# Altium PCB VolumeAttenuator.PcbDoc
Units mm, origin at the board's own origin, x right, y up, seen from the top; angles counter-clockwise.
Board outline 99.06 x 48.26 mm, 2 copper layers (Top Layer, Bottom Layer); 79 components, 75 nets, 291 pads, 27 vias.
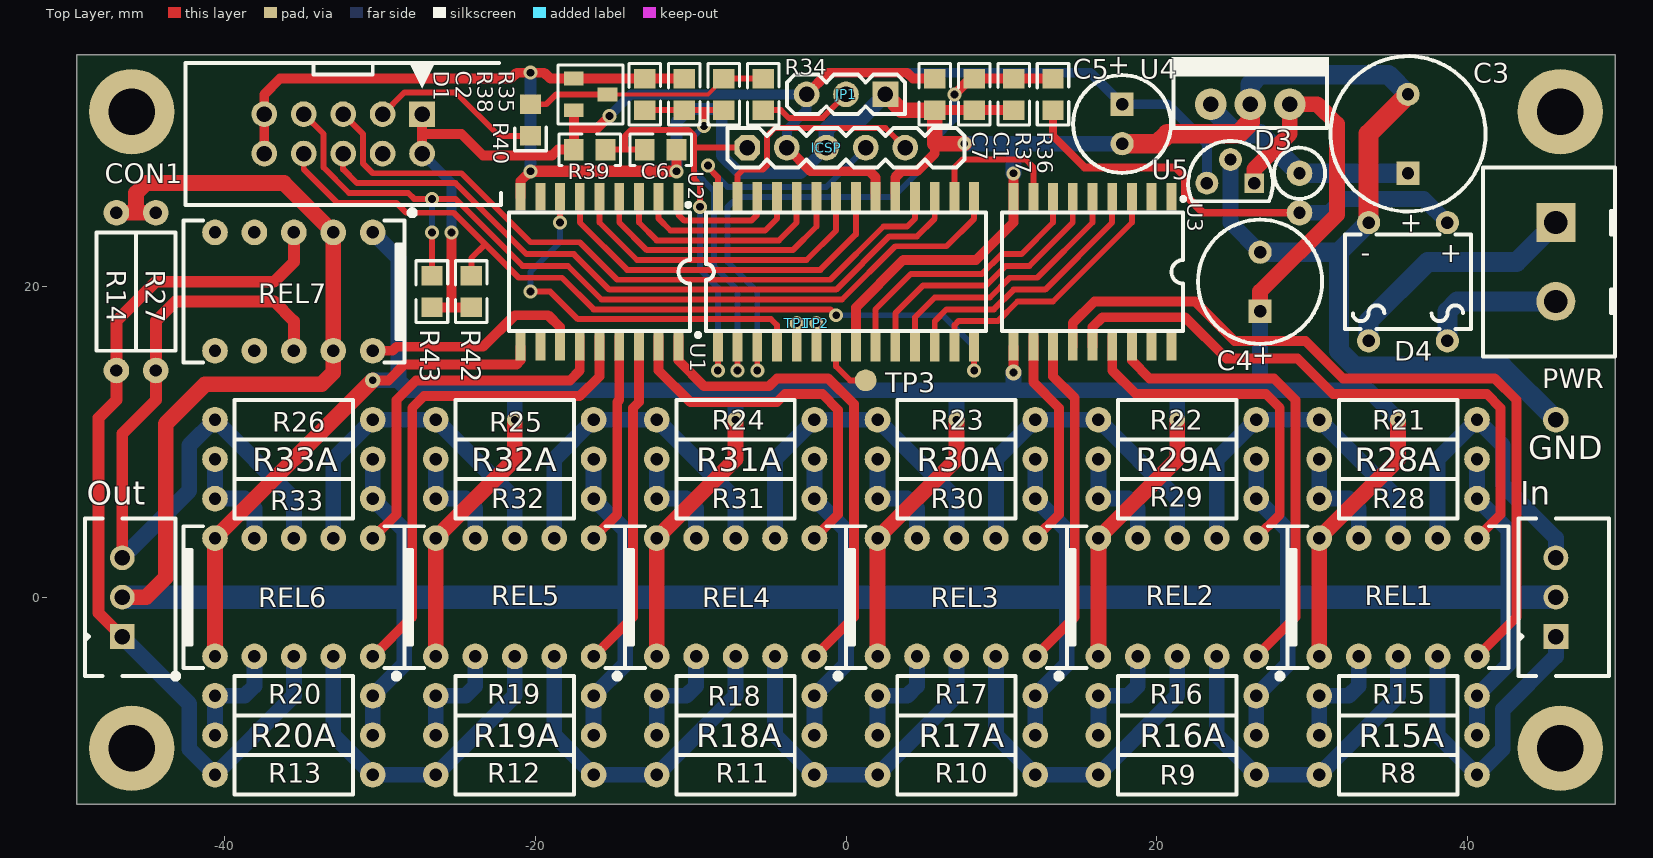
[diagram p0: Top Layer view]
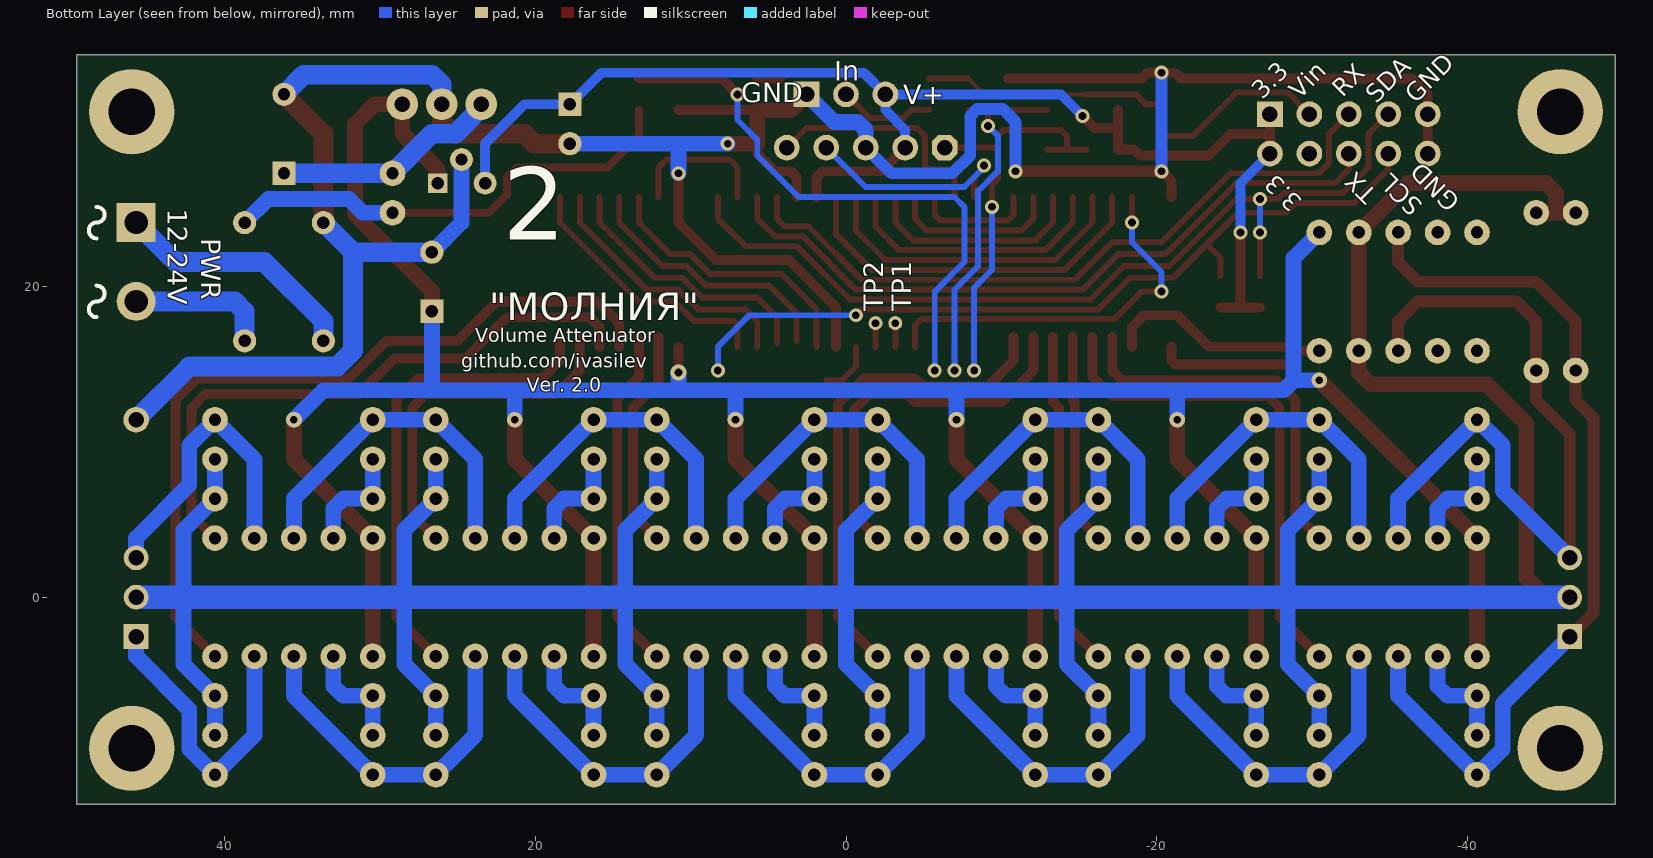
[diagram p1: Bottom Layer view, seen from below]

## Layer stack, top to bottom
Top Layer: signal copper 0.0356
Dielectric: dielectric 0.32, FR-4, Dk 4.8
Bottom Layer: signal copper 0.0356

## Board outline
-49.53,-13.335 -49.53,34.925 49.53,34.925 49.53,-13.335

## Design rules (kind name [scope] priority, off if disabled: settings)
Clearance [All] p1: gap=0.241
ComponentClearance [All] p1: gap=0.254 collisioncheckmode=3 verticalgap=0.254
HoleSize [All] p1: absolutevalues=TRUE maxlimit=5 minlimit=0.5 maxpercent=80.000 minpercent=20.000
PolygonConnect [All] p1: connectstyle=Relief reliefconductorwidth=0.254 reliefentries=4 polygonreliefangle="90 Angle"
RoomDefinition U_Power [InComponentClass('U_Power')] p1: confinementstyle=ConfineIn formatcopy=TRUE lockcomponents=FALSE outline 50.038,35.306 -24.13,35.306 -24.13,-13.335 50.038,-13.335
RoomDefinition U_Control [InComponentClass('U_Control')] p2: confinementstyle=ConfineIn formatcopy=TRUE lockcomponents=FALSE outline 49.53,35.306 -24.13,35.306 -24.13,-13.335 49.53,-13.335
RoomDefinition U_Attenuator [InComponentClass('U_Attenuator')] p3: confinementstyle=ConfineIn formatcopy=TRUE lockcomponents=FALSE outline 49.784,35.306 -24.13,35.306 -24.13,-13.335 49.784,-13.335
RoomDefinition Main [InComponentClass('Main')] p4: confinementstyle=ConfineIn formatcopy=TRUE lockcomponents=FALSE outline 50.673,-14.224 70.358,-14.224 70.358,-1.016 50.673,-1.016
RoutingVias [All] p1: holewidth=0.711 width=1.27 viastyle="Through Hole" minholewidth=0.711 minwidth=1.27 maxholewidth=0.711 maxwidth=1.27
SolderMaskExpansion [All] p1: expansion=0.102
TestPointUsage [All] p1: valid=0 allowmultiple=FALSE
Testpoint [All] p1: side=15 testpointundercomponent=TRUE minsize=1.016 maxsize=2.54 preferedsize=1.524 minholesize=0 maxholesize=1.016 preferedholesize=0.813 testpointgrid=0.025 style=1023 order=0123456789
Width [All] p1: maxlimit=2.54 minlimit=0.254 preferedwidth=0.254 toplayer_prefwidth=0.381 bottomlayer_prefwidth=0.381 minimp=50.000000 maximp=50.000000 favimp=50.000000
17 further rules are at their usual default settings.

## Classes and differential pairs
component class U_Power: C3 C4 C5 D3 D4 U4 U5
component class U_Control: C1 C2 C6 C7 D1 ICSP R34 R35 R36 R37 R38 R39 R40 R42 R43 TP1 TP2 TP3 U1
component class U_Attenuator: R8 R9 R10 R11 R12 R13 R14 R15 R15A R16 R16A R17 R17A R18 R18A R19 R19A R20 R20A R21 R22 R23 R24 R25 R26 R27 R28 R28A R29 R29A R30 R30A R31 R31A R32 R32A R33 R33A REL1 REL2 REL3 REL4 REL5 REL6 REL7 U2 U3 U?
component class Main: CON1 GND In J3 J5 JP1 Out PWR

## Components (designator, comment, footprint, x,y, rotation, side; value= is the part's Value field where it differs from the comment)
C1 "100nF" 0805_1 8.255,32.385 r270 top
C2 "100nF" 0805_1 -12.954,32.385 r90 top
C3 "470uF/35V" EC10x20 36.195,29.845 r90 top
C4 "470uF/35V" EC8x16 26.67,20.32 r90 top
C5 "1000uF/16V" EC6.3x12 17.78,30.48 r270 top
C6 "10nF" 0805_1 -11.938,28.829 r0 top
C7 "100nF" 0805_1 5.715,32.385 r270 top
CON1 "BH10S" BH10S -32.385,29.845 r0 top
D1 "BAV99" SOT-23 -16.51,32.385 r270 top
D3 "1N4007" R400_V 29.21,27.305 r270 top
D4 "DB107" BRIDGE_PTH 36.195,20.32 r0 top
GND "TESTPAD" MISC_PAD-36/65 45.72,11.43 r90 top (schematic designator TP4)
ICSP "CON6" JP6 0,28.956 r0 top
In "CON3" CON_WS03S 45.72,0 r90 top
JP1 "Jumper, 3pin" JP3 0,32.385 r180 top
Out "CON3" CON_WS03S -46.609,0 r90 top
PWR "Power" CONN_TOP_2P 45.72,21.59 r270 top
R8 "560" R400_1 35.56,-11.43 r180 top
R9 "1.1k" R400_1 21.336,-11.43 r180 top
R10 "2.05k" R400_1 7.112,-11.43 r180 top
R11 "3.6k" R400_1 -7.112,-11.43 r180 top
R12 "5.9k" R400_1 -21.336,-11.43 r180 top
R13 "8.2k" R400_1 -35.56,-11.43 r180 top
R14 "18k" R400_1 -46.99,19.685 r270 top
R15 "169k" R400_1 35.56,-6.35 r180 top
R15A "NA" R400_1 35.56,-8.89 r180 top
R16 "82k" R400_1 21.336,-6.35 r180 top
R16A "NA" R400_1 21.336,-8.89 r180 top
R17 "38k" R400_1 7.112,-6.35 r180 top
R17A "NA" R400_1 7.112,-8.89 r180 top
R18 "16.9k" R400_1 -7.112,-6.35 r180 top
R18A "NA" R400_1 -7.112,-8.89 r180 top
R19 "6.49k" R400_1 -21.336,-6.35 r180 top
R19A "NA" R400_1 -21.336,-8.89 r180 top
R20 "1.8k" R400_1 -35.56,-6.35 r180 top
R20A "NA" R400_1 -35.56,-8.89 r180 top
R21 "560" R400_1 35.56,11.43 r180 top
R22 "1.1k" R400_1 21.336,11.43 r180 top
R23 "2.05k" R400_1 7.112,11.43 r180 top
R24 "3.6k" R400_1 -7.112,11.43 r180 top
R25 "5.9k" R400_1 -21.336,11.43 r180 top
R26 "8.2k" R400_1 -35.56,11.43 r180 top
R27 "18k" R400_1 -44.45,19.685 r270 top
R28 "169k" R400_1 35.56,6.35 r180 top
R28A "NA" R400_1 35.56,8.89 r180 top
R29 "82k" R400_1 21.336,6.35 r180 top
R29A "NA" R400_1 21.336,8.89 r180 top
R30 "38k" R400_1 7.112,6.35 r180 top
R30A "NA" R400_1 7.112,8.89 r180 top
R31 "16.9k" R400_1 -7.112,6.35 r180 top
R31A "NA" R400_1 -7.112,8.89 r180 top
R32 "6.49k" R400_1 -21.336,6.35 r180 top
R32A "NA" R400_1 -21.336,8.89 r180 top
R33 "1.8k" R400_1 -35.56,6.35 r180 top
R33A "NA" R400_1 -35.56,8.89 r180 top
R34 "1k/1%" 0805_1 -5.334,32.385 r270 top
R35 "1k/1%" 0805_1 -7.874,32.385 r90 top
R36 "22k/1%" 0805_1 13.335,32.385 r270 top
R37 "2.2k/1%" 0805_1 10.795,32.385 r90 top
R38 "2.2k/1%" 0805_1 -10.414,32.385 r270 top
R39 "10k" 0805_1 -16.51,28.829 r180 top
R40 "1k/1%" 0805_1 -20.32,30.734 r270 top
R42 "4.7k" 0805_1 -24.13,19.685 r270 top
R43 "4.7k" 0805_1 -26.67,19.685 r270 top
REL1 "AZ850-P2" RELAY_AZ850 35.56,0 r0 top
REL2 "AZ850-P2" RELAY_AZ850 21.336,0 r0 top
REL3 "AZ850-P2" RELAY_AZ850 7.112,0 r0 top
REL4 "AZ850-P2" RELAY_AZ850 -7.112,0 r0 top
REL5 "AZ850-P2" RELAY_AZ850 -21.336,0 r0 top
REL6 "AZ850-P2" RELAY_AZ850 -35.56,0 r0 top
REL7 "AZ850" RELAY_AZ850 -35.56,19.685 r180 top
TP1 "TESTPAD" PAD-36/65#1 -3.175,17.653 r0 top
TP2 "TESTPAD" PAD-36/65#1 -1.905,17.653 r90 top
TP3 "TESTPAD" PAD-36/65#2 1.27,13.97 r90 top
U1 "PIC18F26K20-I/SO" SOIC-28 0,20.955 r90 top
U2 "ULN2803" SOIC-18 -15.875,20.955 r270 top
U3 "ULN2803" SOIC-18 15.875,20.955 r270 top
U4 "7812" TO-220-V 26.035,31.75 r0 top
U5 "78L33" IC_TO-92 24.765,26.67 r0 top

## Footprints (in the part's own frame and the unit in brackets; to place one, negate y for a bottom-side part, rotate by r counter-clockwise, add the part's x,y. Pads: shape width x height; smd on the part's side, far side on the other; paste and mask are expansions set on the pad)
0805_1 [mil]
  rect 50x54 smd: 1(-40,0) 2(40,0)
  silkscreen extent -78,-40 78,40
BH10S [mil] "BH-10"
  rect 65x65 hole 39.37: 1(200,50)
  round 65 hole 39.37: 2(200,-50) 3(100,50) 4(100,-50) 5(0,50) 6(0,-50) 7(-100,50) 8(-100,-50) 9(-200,50) 10(-200,-50)
  silkscreen extent -400,-180 400,180
BRIDGE_PTH [mm]
  round 1.5 hole 0.8: 1(-2.54,-3.81) 2(2.54,-3.81) 3(2.54,3.81) 4(-2.54,3.81)
  silkscreen extent -4.06,-3.05 4.06,3.05
CON_WS03S [mm] "2.50mm connector, PCB mount, mate with HS2"
  rect 1.6x1.6 hole 1: 1(-2.54,0)
  round 1.6 hole 1: 2(0,0) 3(2.54,0)
  silkscreen extent -5.08,-3.43 5.08,2.41
CONN_TOP_2P [mm] "Weidumuller - SL 5.08/2/180B"
  rect 2.5x2.5 hole 1.5: 1(-2.54,0)
  round 2.5 hole 1.5: 2(2.54,0)
  silkscreen extent -6.1,-4.7 6.1,3.81
EC6.3x12 [mm] "470uF/6.3V;330uF/10V;220uF/16V;100uF/25V;68uF/35V;47uF/50V;33uF/63V;10uF/100V;2.2uF/160V;2.2uF/200V;1uF/250V;1uF/350V"
  rect 1.5x1.5 hole 0.8: 1(-1.27,0)
  round 1.5 hole 0.8: 2(1.27,0)
  silkscreen extent -3.15,-3.15 3.15,3.15
EC8x16 [mm] "1000uF/6.3V;1000uF/10V;1000uF/16V;470uF/25V;220uF/35V;100uF/50V;100uF/63V;33uF/100V;4.7uF/160V;3.3uF/200V;2.2uF/250V;1uF/400V;1uF/450V"
  rect 1.5x1.5 hole 0.8: 1(-1.905,0)
  round 1.5 hole 0.8: 2(1.905,0)
  silkscreen extent -4,-4 4,4
EC10x20 [mm] "3300uF/6.3V;2200uF/10V;1000uF/25V;680uF/35V;330uF/50V;220uF/63V;100uF/100V;33uF/160V;33uF/200V;22uF/250V;10uF/350V;10uF/400V;6.8uF/450V"
  rect 1.5x1.5 hole 0.8: 1(-2.54,0)
  round 1.5 hole 0.8: 2(2.54,0)
  silkscreen extent -5,-5 5,5
IC_TO-92 [mil] "For 78Lxx"
  rect 50x50 hole 31.5: 1(60,0)
  round 57.99 hole 31.5: 2(0,60)
  round 58 hole 31.5: 3(-60,0)
  silkscreen extent -107,-47 107,107
JP3 [mil] "Jumper,3pin"
  rect 65x65 hole 39.37: 1(-100,0)
  round 65 hole 39.37: 2(0,0) 3(100,0)
  silkscreen extent -150,-50 150,50
JP6 [mil] "Jumper header, 6pin"
  oct 65x65 hole 39.37: 1(-250,0)
  round 65 hole 39.37: 2(-150,0) 3(-50,0) 4(50,0) 5(150,0)
  silkscreen extent -300,-50 300,50
MISC_PAD-36/65 [mil]
  round 65 hole 39.37: 1(0,0)
PAD-36/65#1 [mm]
  round 0.9 hole 0.5: 1(0,0)
PAD-36/65#2 [mm]
  round 1.4 smd: 1(0,0)
R400_1 [mil]
  round 65 hole 31.5: 1(-200,0) 2(200,0)
  silkscreen extent -150,-50 150,50
R400_V [mil]
  round 65 hole 31.5: 1(100,0) 2(0,0)
  silkscreen extent -65,-65 65,65
RELAY_AZ850 [mil] "AZ850 (and others) relay"
  round 65 hole 31.5: 1(-200,-150) 2(-100,-150) 3(0,-150) 4(100,-150) 5(200,-150) 6(200,150) 7(100,150) 8(0,150) 9(-100,150) 10(-200,150)
  silkscreen extent -307,-207 280,180
SOIC-18 [mil] "For PIC18F1x20-SO"
  rect 70x25 smd: 1(-190,200) 2(-190,150) 3(-190,100) 4(-190,50) 5(-190,0) 6(-190,-50) 7(-190,-100) 8(-190,-150) 9(-190,-200) 10(190,-200) 11(190,-150) 12(190,-100) 13(190,-50) 14(190,0) 15(190,50) 16(190,100) 17(190,150) 18(190,200)
  silkscreen extent -150,-230 150,230
SOIC-28 [mil] "for PIC18F2525-SO"
  rect 75x25 smd: 1(-190,325) 2(-190,275) 3(-190,225) 4(-190,175) 5(-190,125) 6(-190,75) 7(-190,25) 8(-190,-25) 9(-190,-75) 10(-190,-125) 11(-190,-175) 12(-190,-225) 13(-190,-275) 14(-190,-325) 15(190,-325) 16(190,-275) 17(190,-225) 18(190,-175) 19(190,-125) 20(190,-75) 21(190,-25) 22(190,25) 23(190,75) 24(190,125) 25(190,175) 26(190,225) 27(190,275) 28(190,325)
  silkscreen extent -150,-355 150,355
SOT-23 [mil]
  rect 35x50 smd: 1(-40,-40) 2(40,-40) 3(0,45)
  silkscreen extent -75,-80 75,85
TO-220-V [mil]
  round 80 hole 39.37: 1(-100,0) 2(0,0) 3(100,0)
  silkscreen extent -200,-60 200,120

## Part data
C1 C2 C6 C7: library part CAP, "Capacitor"
C3 C4 C5: library part ELECTRO1, "Electrolytic Capacitor"
CON1: library part CON2x5, "BH10S-side mounted"
D1: "SOT23 Silicon Planar High-Speed Switching Series Diode Pair"
D3: library part DIODE, "Diode"
D4: library part BRIDGE
ICSP In Out: "Connector"
JP1: library part JP3
PWR: library part CON2, "Connector"
R8 R9 R10 R11 R12 R13 R14 R15 R15A R16 R16A R17 R17A R18 R18A R19 R19A R20 R20A R21 R22 R23 R24 R25 R26 R27 R28 R28A R29 R29A R30 R30A R31 R31A R32 R32A R33 R33A R34 R35 R36 R37 R38 R39 R40 R42 R43: library part RES, "Resistor"
REL1 REL2 REL3 REL4 REL5 REL6: library part AZ850, "bi-stable relay"
REL7: "bi-stable relay"
U1: "PIC18 mid-range mcu"
U2 U3: "HIGH-VOLTAGE,HIGH-CURRENT DARLINTON ARRAYS"
U4 U5: library part 78XX

## Free pads (board coordinates)
  round 5.5 hole 3: 1(-46,-9.73) 1(-46,31.27) 1(46,-9.73) 1(46,31.27)

## Via types
v1: diameter 0.9, hole 0.5, Top Layer to Bottom Layer, tented both sides, 20 vias
v2: diameter 1.016, hole 0.5, Top Layer to Bottom Layer, tented both sides, 7 vias

## Nets (pads, with @x,y where several pads share a name; then routed paths per layer and width w, separated by ;. In a path a pad name is that pad's centre, name@x,y a point inside that pad or via, vN(x,y) a via of type N, cw(c..) or ccw(c..) an arc to the next point about the centre after c; other vN are vias at no path point)
3.3V: C5.1 C7.1 CON1.1 CON1.2 D1.2 ICSP.2 JP1.3 R39.2 R42.2 R43.2 U1.20 U5.3 | length 96.1
  Top Layer w0.254: ICSP.2 ICSP.2@-3.81,29.21
  Top Layer w0.635: CON1.2 CON1.1 ; -27.305,29.845 -24.765,29.845 -23.368,28.448 -18.923,28.448 -18.542,28.829 R39.2 ; R43.2 R42.2 ; -25.4,18.669 v1(-25.4,23.495) ; R39.2@-17.526,29.21 D1.2 ; -17.526,30.226 -16.002,30.226 v1(-15.24,30.988) ; ICSP.2 -2.286,27.432 1.524,27.432 1.905,27.051 U1.20 ; JP1.3 -1.143,33.782 3.937,33.782 4.318,33.401 C7.1
  Bottom Layer w0.635: CON1.2 -25.4,26.67 v1(-25.4,23.495) ; v1(-15.24,30.988) -13.843,32.385 JP1.3 ; ICSP.2 -3.81,30.099 -2.54,31.369 JP1.3 ; U5.3 23.241,29.21 20.701,31.75 C5.1 15.748,33.782 -1.143,33.782 JP1.3
AGND: In.2 Out.2 R14.1 R15.1 R15A.1 R16.1 R16A.1 R17.1 R17A.1 R18.1 R18A.1 R19.1 R19A.1 R20.1 R20A.1 R27.1 R28.1 R28A.1 R29.1 R29A.1 R30.1 R30A.1 R31.1 R31A.1 R32.1 R32A.1 R33.1 R33A.1 REL7.2 REL7.9 | length 261.6
  Top Layer w1.016: R14.1 R27.1 ; Out.2 -45.085,0 -43.815,1.27 -43.815,11.176 -41.275,13.716 -33.782,13.716 -33.02,14.478 REL7.2 -36.195,26.67 -45.085,26.67 -45.72,26.035 -45.72,24.765
  Bottom Layer w1.016: R20A.1 R20.1 -28.448,-4.318 -28.448,4.318 R33.1 R33A.1 ; R19A.1 R19.1 -14.224,-4.318 -14.224,4.318 R32.1 R32A.1 ; R18A.1 R18.1 0,-4.318 0,4.318 R31.1 R31A.1 ; R17A.1 R17.1 14.224,-4.318 14.224,4.318 R30.1 R30A.1 ; R16A.1 R16.1 28.448,-4.318 28.448,4.318 R29.1 R29A.1 ; R15A.1 R15.1 42.672,-4.318 42.672,4.318 R28.1 R28A.1
  Bottom Layer w1.524: Out.2 In.2
GND: C1.2 C2.2 C3.2 C4.2 C5.2 C6.2 C7.2 CON1.9 CON1.10 D1.1 D4.4 GND.1 ICSP.3 JP1.1 R37.1 R38.1 U1.8 U1.19 U2.9 U3.9 U4.2 U5.2 | length 190.1
  Top Layer w0.508: JP1.1@2.54,32.131 JP1.1
  Top Layer w0.635: CON1.10 -37.465,32.385 -36.449,33.401 -21.59,33.401 -21.209,33.782 -19.431,33.782 -19.05,33.401 R38.1 ; U2.9 -20.955,26.797 v1(-20.32,27.432) ; v1(-10.922,27.432) C6.2 ; U1.8 0.635,18.669 3.683,21.717 8.382,21.717 10.795,24.13 v1(10.795,27.305) ; U1.19 3.175,27.051 3.556,27.432 4.572,27.432 5.715,28.575 5.715,29.21 ; C7.2 R37.1
  Top Layer w0.762: v1(-20.32,27.432) v1(-10.922,27.432)
  Top Layer w1.016: JP1.1 3.556,31.369 C7.2 5.715,29.21 v1(7.62,29.21)
  Top Layer w1.27: C5.2 20.066,29.21 20.701,29.845 25.273,29.845 26.035,30.607 U4.2 ; D4.4 33.655,29.845 C3.2
  Bottom Layer w0.762: v1(-20.32,27.432) v1(-20.32,33.782) ; v1(-10.922,27.432) -10.922,30.607 -10.084,31.445 -8.458,31.445 -8.001,30.988 -8.001,28.448 -6.858,27.305 -2.921,27.305 ICSP.3
  Bottom Layer w1.016: ICSP.3 -1.27,30.099 -0.762,30.607 0.762,30.607 JP1.1 ; v1(7.62,29.21) C5.2 ; v1(10.795,27.305) 10.795,29.21 ; U5.2 24.765,24.13 C4.2
  Bottom Layer w1.27: U4.2 26.035,33.02 26.67,33.655 34.925,33.655 C3.2 ; C4.2 31.75,22.225 ; D4.4 31.75,22.225 ; GND.1 42.291,14.859 32.766,14.859 31.75,15.875 31.75,22.225
M\C\L\R\: C6.1 ICSP.1 R39.1 U1.1 | length 28.9
  Top Layer w0.381: R39.1 C6.1 ; -14.224,28.829 -14.224,29.718 -13.843,30.099 -10.16,30.099 -9.779,29.718 -9.779,26.924 -9.398,26.543 v1(-9.398,25.146) ; -9.779,28.956 ICSP.1 ; v1(-8.255,14.605) U1.1
  Bottom Layer w0.381: v1(-9.398,25.146) -9.398,21.082 -8.255,19.939 v1(-8.255,14.605)
NetC1_1: C1.1 R36.1 R37.2 U1.3 | length 38.8
  Top Layer w0.381: v1(-5.715,14.605) U1.3
  Top Layer w0.635: v1(6.985,32.385) 8.001,33.401 R36.1
  Bottom Layer w0.381: v1(-5.715,14.605) -5.715,19.685 -7.62,21.59 -7.62,25.146 -6.985,25.781 3.048,25.781 5.715,28.448 5.715,29.464 6.985,30.734 v1(6.985,32.385)
NetC2_1: C2.1 R35.1 R38.2 U1.2 | length 24.8
  Top Layer w0.381: C2.1 R35.1 ; v1(-9.144,30.353) -9.144,31.369 ; v1(-6.985,14.605) U1.2
  Bottom Layer w0.381: v1(-9.144,30.353) -9.779,29.718 -9.779,27.432 -8.509,26.162 -8.509,21.336 -6.985,19.812 v1(-6.985,14.605)
NetC3_1: C3.1 D3.2 U4.1 | length 14.7
  Bottom Layer w1.27: U4.1 23.495,31.496 25.136,29.855 26.66,29.855 D3.2 C3.1
NetC4_1: C4.1 REL1.1 REL1.10 REL2.1 REL2.10 REL3.1 REL3.10 REL4.1 REL4.10 REL5.1 REL5.10 REL6.1 REL6.10 REL7.1 U2.10 U3.10 U4.3 U5.1 | length 236.2
  Top Layer w0.635: v2(-30.48,13.97) -29.464,13.97 -28.448,14.986 -21.209,14.986 -20.955,15.24 U2.10 ; v2(10.795,14.478) U3.10
  Top Layer w1.016: REL6.1 REL6.10 v2(-30.48,13.97) ; REL5.1 REL5.10 -21.336,8.89 v2(-21.336,11.43) ; REL4.1 REL4.10 -7.112,8.89 v2(-7.112,11.43) ; REL3.1 REL3.10 7.112,8.89 v2(7.112,11.43) ; REL2.1 REL2.10 21.336,8.89 v2(21.336,11.43) ; U5.1 26.289,27.559 28.575,29.845 U4.3 30.353,31.75 31.623,30.48 31.623,24.638 26.67,19.685 C4.1 ; REL1.1 REL1.10 35.56,8.89 v2(35.56,11.43)
  Bottom Layer w1.016: v2(-30.48,13.97) -28.829,13.97 ; REL7.1 -28.829,21.844 -28.829,13.97 ; v2(-21.336,11.43) -21.336,13.335 ; v2(-7.112,11.43) -7.112,13.335 ; v2(7.112,11.43) 7.112,13.335 ; 10.795,13.335 v2(10.795,14.478) ; v2(21.336,11.43) 21.336,13.335 ; 26.67,13.335 C4.1 ; v2(35.56,11.43) 33.655,13.335 -28.194,13.335 -28.829,13.97
NetCON1_3: CON1.3 R40.2 | length 11.3
  Top Layer w0.381: CON1.3 -28.448,32.512 -25.146,32.512 -22.352,29.718 R40.2
NetD1_3: D1.3 R34.1 R35.2 R40.1 | length 15.7
  Top Layer w0.254: D1.3 -8.89,32.385 R35.2
  Top Layer w0.381: R40.1 -19.304,31.75 -18.669,32.385 D1.3 ; R35.2 R34.1
NetD3_1: D3.1 D4.3 R36.2 | length 30.8
  Top Layer w0.508: R36.2 13.335,29.718 15.367,27.686 21.209,27.686 21.844,27.051 21.844,25.908 22.987,24.765 D3.1
  Bottom Layer w1.016: D3.1 31.115,24.765 32.004,25.654 37.211,25.654 D4.3
NetD4_1: D4.1 PWR.1 | length 16
  Bottom Layer w1.27: D4.1 33.655,17.78 37.465,21.59 43.18,21.59 PWR.1
NetD4_2: D4.2 PWR.2 | length 9.2
  Bottom Layer w1.27: D4.2 38.735,18.415 39.37,19.05 PWR.2
NetIn_1: In.1 R8.1 REL1.4 | length 19.7
  Bottom Layer w1.016: REL1.4 38.1,-8.89 R8.1 42.291,-9.779 42.291,-7.239 45.72,-3.81 In.1
NetIn_3: In.3 R21.1 REL1.7 | length 19.7
  Bottom Layer w1.016: REL1.7 38.1,8.89 R21.1 42.291,9.779 42.291,7.239 45.72,3.81 In.3
NetJP1_2: JP1.2 R34.2 | length 6.2
  Top Layer w0.381: R34.2 -4.191,31.369 -3.683,30.861 -1.524,30.861 JP1.2
NetOut_1: Out.1 R13.2 R14.2 REL6.3 REL7.3 | length 57.4
  Top Layer w0.762: Out.1 -48.133,-1.016 -48.133,11.557 -46.99,12.7 -46.99,17.78 -44.45,20.32 -36.83,20.32 -35.56,21.59 REL7.3
  Bottom Layer w1.016: Out.1 -42.291,-6.858 -42.291,-9.779 R13.2 -35.56,-6.35 REL6.3
NetOut_3: Out.3 R26.2 R27.2 REL6.8 REL7.8 | length 49.1
  Top Layer w0.762: Out.3 -46.609,10.541 -44.45,12.7 -44.45,17.78 -43.18,19.05 -36.83,19.05 -35.56,17.78 REL7.8
  Bottom Layer w1.016: Out.3 -42.291,6.858 -42.291,9.779 R26.2 -35.56,6.35 REL6.8
NetR8_2: R8.2 R9.1 REL1.3 REL2.4 | length 22.5
  Bottom Layer w1.016: REL2.4 23.876,-8.89 R9.1 R8.2 35.56,-6.35 REL1.3
NetR9_2: R9.2 R10.1 REL2.3 REL3.4 | length 22.5
  Bottom Layer w1.016: REL3.4 9.652,-8.89 R10.1 R9.2 21.336,-6.35 REL2.3
NetR10_2: R10.2 R11.1 REL3.3 REL4.4 | length 22.5
  Bottom Layer w1.016: REL4.4 -4.572,-8.89 R11.1 R10.2 7.112,-6.35 REL3.3
NetR11_2: R11.2 R12.1 REL4.3 REL5.4 | length 22.5
  Bottom Layer w1.016: REL5.4 -18.796,-8.89 R12.1 R11.2 -7.112,-6.35 REL4.3
NetR12_2: R12.2 R13.1 REL5.3 REL6.4 | length 22.5
  Bottom Layer w1.016: REL6.4 -33.02,-8.89 R13.1 R12.2 -21.336,-6.35 REL5.3
NetR15_2: R15.2 R15A.2 REL1.2 | length 7.2
  Bottom Layer w1.016: R15A.2 R15.2 32.385,-6.35 33.02,-5.715 REL1.2
NetR16_2: R16.2 R16A.2 REL2.2 | length 7.2
  Bottom Layer w1.016: R16A.2 R16.2 18.161,-6.35 18.796,-5.715 REL2.2
NetR17_2: R17.2 R17A.2 REL3.2 | length 7.2
  Bottom Layer w1.016: R17A.2 R17.2 3.937,-6.35 4.572,-5.715 REL3.2
NetR18_2: R18.2 R18A.2 REL4.2 | length 7.2
  Bottom Layer w1.016: R18A.2 R18.2 -10.287,-6.35 -9.652,-5.715 REL4.2
NetR19_2: R19.2 R19A.2 REL5.2 | length 7.2
  Bottom Layer w1.016: R19A.2 R19.2 -24.511,-6.35 -23.876,-5.715 REL5.2
NetR20_2: R20.2 R20A.2 REL6.2 | length 7.2
  Bottom Layer w1.016: R20A.2 R20.2 -38.735,-6.35 -38.1,-5.715 REL6.2
NetR21_2: R21.2 R22.1 REL1.8 REL2.7 | length 22.5
  Bottom Layer w1.016: REL2.7 23.876,8.89 R22.1 R21.2 35.56,6.35 REL1.8
NetR22_2: R22.2 R23.1 REL2.8 REL3.7 | length 22.5
  Bottom Layer w1.016: REL3.7 9.652,8.89 R23.1 R22.2 21.336,6.35 REL2.8
NetR23_2: R23.2 R24.1 REL3.8 REL4.7 | length 22.5
  Bottom Layer w1.016: REL4.7 -4.572,8.89 R24.1 R23.2 7.112,6.35 REL3.8
NetR24_2: R24.2 R25.1 REL4.8 REL5.7 | length 22.5
  Bottom Layer w1.016: REL5.7 -18.796,8.89 R25.1 R24.2 -7.112,6.35 REL4.8
NetR25_2: R25.2 R26.1 REL5.8 REL6.7 | length 22.5
  Bottom Layer w1.016: REL6.7 -33.02,8.89 R26.1 R25.2 -21.336,6.35 REL5.8
NetR28_2: R28.2 R28A.2 REL1.9 | length 7.2
  Bottom Layer w1.016: R28A.2 R28.2 32.385,6.35 33.02,5.715 REL1.9
NetR29_2: R29.2 R29A.2 REL2.9 | length 7.2
  Bottom Layer w1.016: R29A.2 R29.2 18.161,6.35 18.796,5.715 REL2.9
NetR30_2: R30.2 R30A.2 REL3.9 | length 7.2
  Bottom Layer w1.016: R30A.2 R30.2 3.937,6.35 4.572,5.715 REL3.9
NetR31_2: R31.2 R31A.2 REL4.9 | length 7.2
  Bottom Layer w1.016: R31A.2 R31.2 -10.287,6.35 -9.652,5.715 REL4.9
NetR32_2: R32.2 R32A.2 REL5.9 | length 7.2
  Bottom Layer w1.016: R32A.2 R32.2 -24.511,6.35 -23.876,5.715 REL5.9
NetR33_2: R33.2 R33A.2 REL6.9 | length 7.2
  Bottom Layer w1.016: R33A.2 R33.2 -38.735,6.35 -38.1,5.715 REL6.9
NetREL1_5: REL1.5 U3.13 | length 50.9
  Top Layer w0.635: U3.13 14.605,17.653 16.002,19.05 22.479,19.05 25.019,16.51 29.591,16.51 32.004,14.097 41.783,14.097 43.18,12.7 43.18,-1.27 REL1.5
NetREL1_6: REL1.6 U3.14 | length 39.3
  Top Layer w0.635: U3.14 15.875,17.399 16.51,18.034 21.844,18.034 24.511,15.367 29.083,15.367 31.369,13.081 41.275,13.081 42.164,12.192 42.164,5.334 REL1.6
NetREL2_5: REL2.5 U3.16 | length 30.7
  Top Layer w0.635: U3.16@18.415,16.764 18.415,15.24 19.558,14.097 27.559,14.097 28.956,12.7 28.956,-1.27 REL2.5
NetREL2_6: REL2.6 U3.15 | length 23
  Top Layer w0.635: U3.15@17.145,16.764 17.145,14.605 18.669,13.081 27.051,13.081 27.94,12.192 27.94,5.334 REL2.6
NetREL3_5: REL3.5 U3.12 | length 22.2
  Top Layer w0.635: REL3.5 14.732,-1.27 14.732,12.827 13.335,14.224 U3.12@13.335,16.764
NetREL3_6: REL3.6 U3.11 | length 14.3
  Top Layer w0.635: U3.11@12.065,16.764 12.065,13.843 13.716,12.192 13.716,5.334 REL3.6
NetREL4_5: REL4.5 U2.18 | length 31.7
  Top Layer w0.635: U2.18@-10.795,16.764 -10.795,15.24 -9.144,13.589 -4.953,13.589 -4.445,14.097 -1.143,14.097 0.508,12.446 0.508,-1.27 REL4.5
NetREL4_6: REL4.6 U2.17 | length 24.1
  Top Layer w0.635: U2.17@-12.065,16.764 -12.065,14.605 -10.033,12.573 -4.445,12.573 -3.937,13.081 -1.524,13.081 -0.508,12.065 -0.508,5.334 REL4.6
NetREL5_5: REL5.5 U2.16 | length 21.8
  Top Layer w0.635: REL5.5 -13.716,-1.27 -13.716,12.192 -13.335,12.573 U2.16@-13.335,16.764
NetREL5_6: REL5.6 U2.15 | length 13.6
  Top Layer w0.635: REL5.6 -14.732,5.334 -14.732,12.573 -14.605,12.7 U2.15@-14.605,16.764
NetREL6_5: REL6.5 U2.14 | length 32.5
  Top Layer w0.635: REL6.5 -27.94,-1.27 -27.94,12.192 -27.178,12.954 -17.145,12.954 -15.875,14.224 U2.14@-15.875,16.764
NetREL6_6: REL6.6 U2.13 | length 24.3
  Top Layer w0.635: REL6.6 -28.956,5.334 -28.956,12.7 -27.686,13.97 -17.78,13.97 -17.145,14.605 U2.13@-17.145,16.764
NetREL7_10: REL7.10 U2.12 | length 14.6
  Top Layer w0.635: REL7.10 -29.21,15.875 -28.956,16.129 -23.368,16.129 -21.336,18.161 -19.177,18.161 -18.415,17.399 U2.12
NetTP1_1: TP1.1 U1.5 | length 1.5
  Top Layer w0.381: U1.5 TP1.1
NetTP2_1: TP2.1 U1.6 | length 1.5
  Top Layer w0.381: U1.6 TP2.1
NetTP3_1: TP3.1 U1.7 | length 3.5
  Top Layer w0.381: U1.7 -0.635,14.859 0.254,13.97 TP3.1
PGC: ICSP.5 U1.27 | length 15.1
  Top Layer w0.381: U1.27 -6.985,27.178 -6.604,27.559 -5.334,27.559 -5.08,27.813 -5.08,29.718 -4.572,30.226 2.54,30.226 ICSP.5
PGD: ICSP.4 U1.28 | length 13.9
  Top Layer w0.381: v1@-8.89,27.686 -8.255,27.051 U1.28
  Bottom Layer w0.381: v1@-8.89,27.686 -7.62,26.416 -1.27,26.416 ICSP.4
  other v1: -8.89,27.813
R1R: U1.11 U3.5 | length 17.3
  Top Layer w0.381: U1.11@4.445,16.383 4.445,18.034 5.715,19.304 9.271,19.304 10.541,20.574 12.319,20.574 15.875,24.13 U3.5
R1S: U1.10 U3.6 | length 17.3
  Top Layer w0.381: U1.10@3.175,16.51 3.175,18.288 4.953,20.066 9.017,20.066 10.287,21.336 11.811,21.336 14.605,24.13 U3.6
R2R: U1.12 U3.4 | length 17.4
  Top Layer w0.381: U1.12 5.715,17.78 6.477,18.542 9.525,18.542 10.795,19.812 12.827,19.812 17.145,24.13 U3.4
R2S: U1.13 U3.3 | length 17.2
  Top Layer w0.381: U1.13 6.985,17.526 7.239,17.78 9.779,17.78 11.049,19.05 13.335,19.05 18.415,24.13 U3.3
R3R: U1.16 U3.8 | length 9.3
  Top Layer w0.381: U1.16 6.985,27.686 7.493,28.194 11.557,28.194 12.065,27.686 U3.8
R3S: U1.9 U3.7 | length 17.8
  Top Layer w0.381: U1.9 1.905,18.542 4.191,20.828 8.763,20.828 10.033,22.098 11.303,22.098 13.335,24.13 U3.7
R4R: U1.25 U2.2 | length 11
  Top Layer w0.381: U2.2 -12.065,24.384 -11.303,23.622 -5.207,23.622 -4.445,24.384 U1.25
R4S: U1.26 U2.1 | length 7.7
  Top Layer w0.381: U2.1 -10.795,24.638 -10.414,24.257 -6.096,24.257 -5.715,24.638 U1.26
R5R: U1.23 U2.4 | length 17.6
  Top Layer w0.381: U2.4 -14.605,24.13 -12.827,22.352 -3.429,22.352 -1.905,23.876 U1.23
R5S: U1.24 U2.3 | length 14.4
  Top Layer w0.381: U2.3 -13.335,24.13 -12.192,22.987 -4.318,22.987 -3.175,24.13 U1.24
R6R: U1.21 U2.6 | length 24.1
  Top Layer w0.381: U2.6 -17.145,24.13 -14.097,21.082 -1.651,21.082 0.635,23.368 U1.21
R6S: U1.22 U2.5 | length 20.8
  Top Layer w0.381: U2.5 -15.875,24.13 -13.462,21.717 -2.54,21.717 -0.635,23.622 U1.22
ROUT: U1.4 U2.7 | length 25.1
  Top Layer w0.381: v1(-20.32,19.685) -19.05,19.685 -17.272,17.907 -4.826,17.907 -4.445,17.526 U1.4 ; v1(-18.415,24.13) U2.7
  Bottom Layer w0.381: v1(-20.32,19.685) -20.32,20.955 -18.415,22.86 v1(-18.415,24.13)
RX: CON1.5 U1.18 | length 45.4
  Top Layer w0.381: CON1.5 -31.115,29.845 -31.115,27.94 -30.48,27.305 -24.765,27.305 -20.32,22.86 -17.145,22.86 -14.732,20.447 -1.016,20.447 2.413,23.876 3.937,23.876 4.445,24.384 U1.18
SCL: CON1.8 R42.1 U1.14 | length 54.4
  Top Layer w0.381: CON1.8 -34.925,27.559 -32.766,25.4 -28.956,25.4 -28.321,24.765 -25.273,24.765 -21.082,20.574 -18.288,20.574 -16.256,18.542 -1.016,18.542 v1(-0.635,18.161) ; R42.1 -24.13,21.844 -23.241,22.733 ; v1(8.255,14.605) U1.14
  Bottom Layer w0.381: v1(-0.635,18.161) 6.223,18.161 8.255,16.129 v1(8.255,14.605)
SDA: CON1.7 R43.1 U1.15 | length 57.9
  Top Layer w0.381: CON1.7 -33.655,29.845 -33.655,27.686 -32.004,26.035 -28.194,26.035 -27.813,25.654 -25.146,25.654 -20.828,21.336 -17.907,21.336 -15.748,19.177 -0.254,19.177 3.175,22.606 6.477,22.606 8.255,24.384 U1.15 ; R43.1 v1(-26.67,23.495)
  Bottom Layer w0.381: v1(-26.67,23.495) v1(-26.67,25.654)
TX: CON1.6 U1.17 | length 45.6
  Top Layer w0.381: CON1.6 -32.385,27.559 -31.496,26.67 -25.146,26.67 -20.574,22.098 -17.526,22.098 -15.24,19.812 -0.635,19.812 2.794,23.241 4.572,23.241 5.715,24.384 U1.17
pads on no net: CON1.4 REL7.4 REL7.5 REL7.6 REL7.7 U2.8 U2.11 U3.1 U3.2 U3.17 U3.18

## Silkscreen, mask and mechanical layers (free items; w line width, h text height)
Top Overlay:
  circle w0.254: c21.717,25.654 r0.127
  circle w0.254: c-10.16,25.273 r0.127
  circle w0.254: c-9.525,16.891 r0.127
Bottom Overlay:
  lines w0.254: 48.26,18.034 ccw(c48.26,18.542) 48.26,19.05 cw(c48.26,19.558) 48.26,20.066 ; 48.26,23.114 ccw(c48.26,23.622) 48.26,24.13 cw(c48.26,24.638) 48.26,25.146
  text "In" at 0.762,33.274 h1.27
  text "RX" at -32.004,32.131 h1.14 r315
  text "Vin" at -29.21,32.004 h1.14 r315
  text "3.3" at -26.797,32.004 h1.14 r315
  text "GND" at 6.731,31.877 h1.27
  text "GND" at -36.703,31.75 h1.14 r315
  text "SDA" at -34.163,31.75 h1.14 r315
  text "V+" at -3.683,31.75 h1.27
  text "TX" at -34.29,26.035 h1.14 r225
  text "GND" at -39.624,25.527 h1.14 r225
  text "3.3" at -29.464,25.527 h1.14 r225
  text "SCL" at -37.211,25.273 h1.14 r225
  text "12-24V" at 43.688,25.019 h1.27 r90
  text "PWR" at 41.529,23.114 h1.27 r90
  text "2" at 22.098,21.463 h8
  text "\"МОЛНИЯ\"" at 22.987,17.272 h3.05
  text "Volume Attenuator" at 23.876,16.129 h1.52
  text "github.com/ivasilev" at 24.765,14.478 h1.52
  text "Ver. 2.0" at 20.574,12.954 h1.52
Mechanical 1:
  the board outline again, w0.254

## Text inside footprints (layer, text, board x,y; h text height)
C3: Top Overlay "+" at 36.945,23.345 h1.27 r90
C4: Top Overlay "+" at 27.42,14.82 h1.27 r90
C5: Top Overlay "+" at 17.03,34.98 h1.27 r270
D4: Top Overlay "+" at 38.227,21.59 h1.27; Top Overlay "-" at 33.147,21.59 h1.27